# EAGLE board line-sensor (EAGLE 9.1.3)
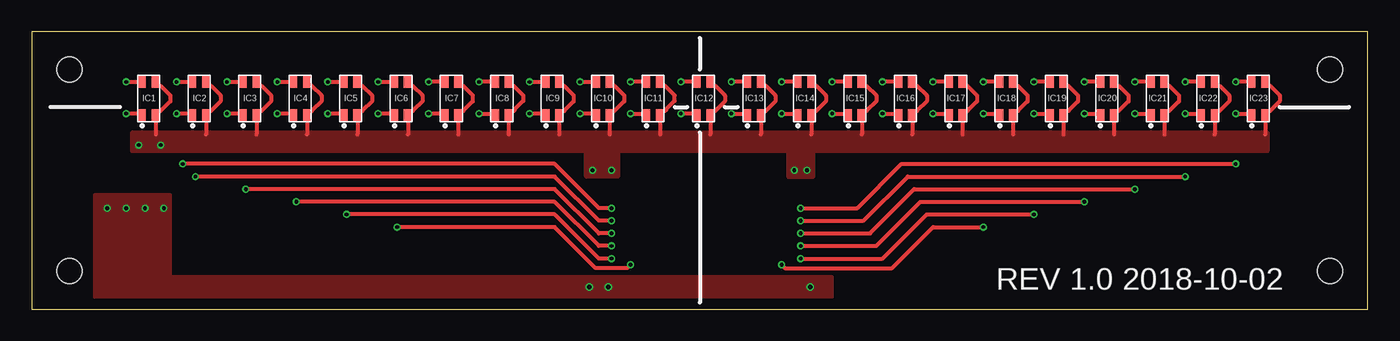
[diagram p0: board, top side]
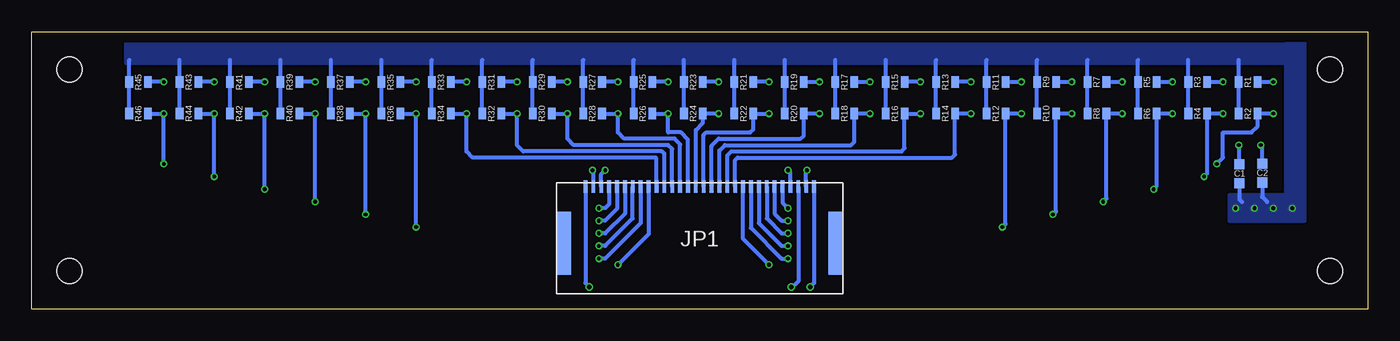
[diagram p1: board, bottom side, seen from below]

Size 106 x 22 mm. Coordinates in mm from the lower left corner, seen from the top.
Outline: 0,0 106,0 106,22 0,22 0,0
Copper layers (1*16): Top 0.035559375mm / dielectric 1.6mm / Bottom 0.035559375mm
Design rules "oshpark-2layer": minimum track width 6mil, minimum drill 10mil, track to track 6mil, track to pad 6mil, pad to pad 6mil, via to via 6mil, smd to smd 6mil, copper to edge 15mil, drill to drill 6mil, minimum pad ring 5mil, minimum via ring 5mil, stop-mask expansion 2.5mil, vias tented up to drill 0mil, thermal gap 10mil
Net classes: 1 ground: width 0.3 mm; 2 3v3: width 0.3 mm
Holes 2 mm at 3,19 3,3 103,19 103,3

## Footprints (pad centres in the part's own frame; a part is rotated, then mirrored left to right if it is on the bottom)
CAPACITOR-0603 = smd 0.8 x 0.8: 1 -0.75,0; 2 0.75,0
GP2S60 = smd 1 x 0.65: 1 -0.65,0.25; 2 -0.65,-0.85; 3 2.05,-0.85; 4 2.05,0.25
MOLEX-502046-3070 = smd 0.3 x 1: 1 9.062,-0.3; 2 8.438,-0.3; 3 7.812,-0.3; 4 7.188,-0.3; 5 6.562,-0.3; 6 5.938,-0.3; 7 5.312,-0.3; 8 4.688,-0.3; 9 4.062,-0.3; 10 3.438,-0.3; 11 2.812,-0.3; 12 2.188,-0.3; 13 1.562,-0.3; 14 0.938,-0.3; 15 0.312,-0.3; 16 -0.312,-0.3; 17 -0.938,-0.3; 18 -1.562,-0.3; 19 -2.188,-0.3; 20 -2.812,-0.3; 21 -3.438,-0.3; 22 -4.062,-0.3; 23 -4.688,-0.3; 24 -5.312,-0.3; 25 -5.938,-0.3; 26 -6.562,-0.3; 27 -7.188,-0.3; 28 -7.812,-0.3; 29 -8.438,-0.3; 30 -9.062,-0.3 | smd 1.15 x 5: NAIL1 10.775,-4.8; NAIL2 -10.775,-4.8
RESISTOR-0603 = smd 0.6 x 0.9: P$1 -0.75,0; P$2 0.75,0

## Placement (x,y rotation side)
C1  0.1u  [CAPACITOR-0603]  10.19,10.72 90 bottom
C2  10u  [CAPACITOR-0603]  8.39,10.78 90 bottom
IC1  GP2S60  [GP2S60]  9,16 90 top
IC2  GP2S60  [GP2S60]  13,16 90 top
IC3  GP2S60  [GP2S60]  17,16 90 top
IC4  GP2S60  [GP2S60]  21,16 90 top
IC5  GP2S60  [GP2S60]  25,16 90 top
IC6  GP2S60  [GP2S60]  29,16 90 top
IC7  GP2S60  [GP2S60]  33,16 90 top
IC8  GP2S60  [GP2S60]  37,16 90 top
IC9  GP2S60  [GP2S60]  41,16 90 top
IC10  GP2S60  [GP2S60]  45,16 90 top
IC11  GP2S60  [GP2S60]  49,16 90 top
IC12  GP2S60  [GP2S60]  53,16 90 top
IC13  GP2S60  [GP2S60]  57,16 90 top
IC14  GP2S60  [GP2S60]  61,16 90 top
IC15  GP2S60  [GP2S60]  65,16 90 top
IC16  GP2S60  [GP2S60]  69,16 90 top
IC17  GP2S60  [GP2S60]  73,16 90 top
IC18  GP2S60  [GP2S60]  77,16 90 top
IC19  GP2S60  [GP2S60]  81,16 90 top
IC20  GP2S60  [GP2S60]  85,16 90 top
IC21  GP2S60  [GP2S60]  89,16 90 top
IC22  GP2S60  [GP2S60]  93,16 90 top
IC23  GP2S60  [GP2S60]  97,16 90 top
JP1  MOLEX-502046-3070  [MOLEX-502046-3070]  53,10 0 bottom
R1  1k  [RESISTOR-0603]  9.5,18 180 bottom
R2  220k  [RESISTOR-0603]  9.5,15.5 180 bottom
R3  1k  [RESISTOR-0603]  13.5,18 180 bottom
R4  220k  [RESISTOR-0603]  13.5,15.5 180 bottom
R5  1k  [RESISTOR-0603]  17.5,18 180 bottom
R6  220k  [RESISTOR-0603]  17.5,15.5 180 bottom
R7  1k  [RESISTOR-0603]  21.5,18 180 bottom
R8  220k  [RESISTOR-0603]  21.5,15.5 180 bottom
R9  1k  [RESISTOR-0603]  25.5,18 180 bottom
R10  220k  [RESISTOR-0603]  25.5,15.5 180 bottom
R11  1k  [RESISTOR-0603]  29.5,18 180 bottom
R12  220k  [RESISTOR-0603]  29.5,15.5 180 bottom
R13  1k  [RESISTOR-0603]  33.5,18 180 bottom
R14  220k  [RESISTOR-0603]  33.5,15.5 180 bottom
R15  1k  [RESISTOR-0603]  37.5,18 180 bottom
R16  220k  [RESISTOR-0603]  37.5,15.5 180 bottom
R17  1k  [RESISTOR-0603]  41.5,18 180 bottom
R18  220k  [RESISTOR-0603]  41.5,15.5 180 bottom
R19  1k  [RESISTOR-0603]  45.5,18 180 bottom
R20  220k  [RESISTOR-0603]  45.5,15.5 180 bottom
R21  1k  [RESISTOR-0603]  49.5,18 180 bottom
R22  220k  [RESISTOR-0603]  49.5,15.5 180 bottom
R23  1k  [RESISTOR-0603]  53.5,18 180 bottom
R24  220k  [RESISTOR-0603]  53.5,15.5 180 bottom
R25  1k  [RESISTOR-0603]  57.5,18 180 bottom
R26  220k  [RESISTOR-0603]  57.5,15.5 180 bottom
R27  1k  [RESISTOR-0603]  61.5,18 180 bottom
R28  220k  [RESISTOR-0603]  61.5,15.5 180 bottom
R29  1k  [RESISTOR-0603]  65.5,18 180 bottom
R30  220k  [RESISTOR-0603]  65.5,15.5 180 bottom
R31  1k  [RESISTOR-0603]  69.5,18 180 bottom
R32  220k  [RESISTOR-0603]  69.5,15.5 180 bottom
R33  1k  [RESISTOR-0603]  73.5,18 180 bottom
R34  220k  [RESISTOR-0603]  73.5,15.5 180 bottom
R35  1k  [RESISTOR-0603]  77.5,18 180 bottom
R36  220k  [RESISTOR-0603]  77.5,15.5 180 bottom
R37  1k  [RESISTOR-0603]  81.5,18 180 bottom
R38  220k  [RESISTOR-0603]  81.5,15.5 180 bottom
R39  1k  [RESISTOR-0603]  85.5,18 180 bottom
R40  220k  [RESISTOR-0603]  85.5,15.5 180 bottom
R41  1k  [RESISTOR-0603]  89.5,18 180 bottom
R42  220k  [RESISTOR-0603]  89.5,15.5 180 bottom
R43  1k  [RESISTOR-0603]  93.5,18 180 bottom
R44  220k  [RESISTOR-0603]  93.5,15.5 180 bottom
R45  1k  [RESISTOR-0603]  97.5,18 180 bottom
R46  220k  [RESISTOR-0603]  97.5,15.5 180 bottom

## Library data of the parts
C1 C2 = capacitors
IC1-IC23 = sensors
JP1 = connectors
R1-R46 = resistors

## Nets
3V3 [3v3]: C1.1 C2.1 JP1.1 JP1.3 JP1.30 R1.P$2 R2.P$2 R3.P$2 R4.P$2 R5.P$2 R6.P$2 R7.P$2 R8.P$2 R9.P$2 R10.P$2 R11.P$2 R12.P$2 R13.P$2 R14.P$2 R15.P$2 R16.P$2 R17.P$2 R18.P$2 R19.P$2 R20.P$2 R21.P$2 R22.P$2 R23.P$2 R24.P$2 R25.P$2 R26.P$2 R27.P$2 R28.P$2 R29.P$2 R30.P$2 R31.P$2 R32.P$2 R33.P$2 R34.P$2 R35.P$2 R36.P$2 R37.P$2 R38.P$2 R39.P$2 R40.P$2 R41.P$2 R42.P$2 R43.P$2 R44.P$2 R45.P$2 R46.P$2
AGND [ground]: C1.2 C2.2 IC1.2 IC1.3 IC2.2 IC2.3 IC3.2 IC3.3 IC4.2 IC4.3 IC5.2 IC5.3 IC6.2 IC6.3 IC7.2 IC7.3 IC8.2 IC8.3 IC9.2 IC9.3 IC10.2 IC10.3 IC11.2 IC11.3 IC12.2 IC12.3 IC13.2 IC13.3 IC14.2 IC14.3 IC15.2 IC15.3 IC16.2 IC16.3 IC17.2 IC17.3 IC18.2 IC18.3 IC19.2 IC19.3 IC20.2 IC20.3 IC21.2 IC21.3 IC22.2 IC22.3 IC23.2 IC23.3 JP1.2 JP1.4 JP1.28 JP1.29
N$1: IC2.4 R3.P$1
N$2: IC1.4 R1.P$1
N$3: IC3.4 R5.P$1
N$4: IC4.4 R7.P$1
N$5: IC5.4 R9.P$1
N$6: IC6.4 R11.P$1
N$7: IC7.4 R13.P$1
N$8: IC8.4 R15.P$1
N$9: IC9.4 R17.P$1
N$10: IC10.4 R19.P$1
N$11: IC11.4 R21.P$1
N$12: IC12.4 R23.P$1
N$13: IC13.4 R25.P$1
N$14: IC14.4 R27.P$1
N$15: IC15.4 R29.P$1
N$16: IC16.4 R31.P$1
N$17: IC17.4 R33.P$1
N$18: IC18.4 R35.P$1
N$19: IC19.4 R37.P$1
N$20: IC20.4 R39.P$1
N$21: IC21.4 R41.P$1
N$22: IC22.4 R43.P$1
N$23: IC23.4 R45.P$1
SENSOR_1: IC1.1 JP1.5 R2.P$1
SENSOR_2: IC2.1 JP1.6 R4.P$1
SENSOR_3: IC3.1 JP1.7 R6.P$1
SENSOR_4: IC4.1 JP1.8 R8.P$1
SENSOR_5: IC5.1 JP1.9 R10.P$1
SENSOR_6: IC6.1 JP1.10 R12.P$1
SENSOR_7: IC7.1 JP1.11 R14.P$1
SENSOR_8: IC8.1 JP1.12 R16.P$1
SENSOR_9: IC9.1 JP1.13 R18.P$1
SENSOR_10: IC10.1 JP1.14 R20.P$1
SENSOR_11: IC11.1 JP1.15 R22.P$1
SENSOR_12: IC12.1 JP1.16 R24.P$1
SENSOR_13: IC13.1 JP1.17 R26.P$1
SENSOR_14: IC14.1 JP1.18 R28.P$1
SENSOR_15: IC15.1 JP1.19 R30.P$1
SENSOR_16: IC16.1 JP1.20 R32.P$1
SENSOR_17: IC17.1 JP1.21 R34.P$1
SENSOR_18: IC18.1 JP1.22 R36.P$1
SENSOR_19: IC19.1 JP1.23 R38.P$1
SENSOR_20: IC20.1 JP1.24 R40.P$1
SENSOR_21: IC21.1 JP1.25 R42.P$1
SENSOR_22: IC22.1 JP1.26 R44.P$1
SENSOR_23: IC23.1 JP1.27 R46.P$1

## Tracks (layer width: path | path; a pad name or v marks a point on that pad's centre or on a via)
3V3  (via drill 0.3, 0.35)
  Bottom 0.3: R20.P$2 R19.P$2 46.25,19.75 | R22.P$2 R21.P$2 50.25,19.75 | R24.P$2 R23.P$2 54.25,19.75 | R26.P$2 R25.P$2 58.25,19.75 | R30.P$2 R29.P$2 66.25,19.75 | R32.P$2 R31.P$2 70.25,19.75 | R34.P$2 R33.P$2 74.25,19.75 | R36.P$2 R35.P$2 78.25,19.75 | R38.P$2 R37.P$2 82.25,19.75 | R40.P$2 R39.P$2 86.25,19.75 | R42.P$2 R41.P$2 90.25,19.75 | R44.P$2 R43.P$2 94.25,19.75 | R46.P$2 R45.P$2 98.25,19.75 | R18.P$2 R17.P$2 42.25,19.75 | R16.P$2 R15.P$2 38.25,19.75 | R14.P$2 R13.P$2 34.25,19.75 | R12.P$2 R11.P$2 30.25,19.75 | R10.P$2 R9.P$2 26.25,19.75 | R8.P$2 R7.P$2 22.25,19.75 | R6.P$2 R5.P$2 18.25,19.75 | R4.P$2 R3.P$2 14.25,19.75 | R2.P$2 R1.P$2 10.25,19.75 | 62.25,19.75 R27.P$2 R28.P$2 | C2.1 8.39,8.89 8,8.5 | C1.1 10.19,8.69 10,8.5 | JP1.1 43.94,2.06 v44.25,1.75 | JP1.3 45.19,2.19 45.62,1.75 v45.75,1.75 | v61.75,1.75 62.06,2.06 JP1.30
  other vias: 6,8 7.5,8 9,8 10.5,8
  pour Bottom: 6,19.5 98.5,19.5 98.5,21 6,21
  pour Bottom: 6.5,21 6.5,9 11,9 11,7 5,7 5,21
  pour Top: 63.5,2.5 38,2.5 11,2.5 11,9 5,9 5,1 32,1 59.5,1 63.5,1
AGND  (via drill 0.3)
  Top 0.3: IC11.3 50.2,17.7 50.24,17.7 51,16.94 51,16.5 50.33,15.82 50.33,15.79 50.24,15.7 50.2,15.7 IC11.2 49.85,13.85 | IC12.3 54.2,17.7 54.24,17.7 55,16.94 55,16.46 54.24,15.7 54.2,15.7 IC12.2 53.85,13.85 | IC13.3 58.2,17.7 58.24,17.7 59,16.94 59,16.46 58.24,15.7 58.2,15.7 IC13.2 57.85,13.85 | IC14.3 62.2,17.7 62.24,17.7 63,16.94 63,16.46 62.24,15.7 62.2,15.7 IC14.2 61.85,13.85 | IC15.3 66.2,17.7 66.24,17.7 67,16.94 67,16.46 66.24,15.7 66.2,15.7 IC15.2 65.85,13.85 | IC16.3 70.2,17.7 70.24,17.7 71,16.94 71,16.46 70.24,15.7 70.2,15.7 IC16.2 69.85,13.85 | IC17.3 74.2,17.7 74.24,17.7 75,16.94 75,16.46 74.24,15.7 74.2,15.7 IC17.2 73.85,13.85 | IC18.3 78.2,17.7 78.24,17.7 79,16.94 79,16.46 78.24,15.7 78.2,15.7 IC18.2 77.85,13.85 | IC19.3 82.2,17.7 82.24,17.7 83,16.94 83,16.46 82.24,15.7 82.2,15.7 IC19.2 81.85,13.85 | IC20.3 86.2,17.7 86.24,17.7 87,16.94 87,16.46 86.24,15.7 86.2,15.7 IC20.2 85.85,13.85 | IC21.3 90.2,17.7 90.24,17.7 91,16.94 91,16.46 90.24,15.7 90.2,15.7 IC21.2 89.85,13.85 | IC22.3 94.2,17.7 94.24,17.7 95,16.94 95,16.46 94.24,15.7 94.2,15.7 IC22.2 93.85,13.85 | IC23.3 98.2,17.7 98.24,17.7 99,16.94 99,16.46 98.24,15.7 98.2,15.7 IC23.2 97.85,13.85 | IC10.3 46.2,17.7 46.24,17.7 47,16.94 47,16.46 46.24,15.7 46.2,15.7 IC10.2 45.85,13.85 | IC9.3 42.2,17.7 42.24,17.7 43,16.94 43,16.46 42.24,15.7 42.2,15.7 IC9.2 41.85,13.85 | IC8.3 38.2,17.7 38.24,17.7 39,16.94 39,16.5 38.33,15.82 38.33,15.79 38.24,15.7 38.2,15.7 IC8.2 37.85,13.85 | IC7.3 34.2,17.7 34.24,17.7 35,16.94 35,16.46 34.24,15.7 34.2,15.7 IC7.2 33.85,13.85 | IC6.3 30.2,17.7 30.24,17.7 31,16.94 31,16.46 30.24,15.7 30.2,15.7 IC6.2 29.85,13.85
  Top 0.3: IC5.3 26.2,17.7 26.24,17.7 27,16.94 27,16.46 26.24,15.7 26.2,15.7 IC5.2 25.85,13.85 | IC4.3 22.2,17.7 22.24,17.7 23,16.94 23,16.46 22.24,15.7 22.2,15.7 IC4.2 21.85,13.85 | IC3.3 18.2,17.7 18.24,17.7 19,16.94 19,16.46 18.24,15.7 18.2,15.7 IC3.2 17.85,13.85 | IC2.3 14.2,17.7 14.24,17.7 15,16.94 15,16.46 14.24,15.7 14.2,15.7 IC2.2 13.85,13.85 | IC1.3 10.2,17.7 10.24,17.7 11,16.94 11,16.46 10.24,15.7 10.2,15.7 IC1.2 9.85,13.85
  Bottom 0.3: JP1.28 60.81,10.69 v60.5,11 | JP1.29 61.44,10.94 v61.5,11 | JP1.2 44.56,10.94 v44.5,11 | JP1.4 45.81,10.81 v46,11 | C2.2 8.39,12.89 v8.5,13 | C1.2 10.19,12.94 v10.25,13
  pour Top: 8,14 98,14 98,12.5 8,12.5
  pour Top: 60,12.5 60,10.5 62,10.5 62,12.5
  pour Top: 44,10.5 44,12.5 46.5,12.5 46.5,10.5
N$1  (via drill 0.3)
  Top 0.3: v11.5,18 12.7,18 IC2.4
  Bottom 0.3: R3.P$1 v11.5,18
N$2  (via drill 0.3)
  Top 0.3: v7.5,18 8.7,18 IC1.4
  Bottom 0.3: R1.P$1 v7.5,18
N$3  (via drill 0.3)
  Top 0.3: v15.5,18 16.7,18 IC3.4
  Bottom 0.3: R5.P$1 v15.5,18
N$4  (via drill 0.3)
  Top 0.3: v19.5,18 20.7,18 IC4.4
  Bottom 0.3: R7.P$1 v19.5,18
N$5  (via drill 0.3)
  Top 0.3: v23.5,18 24.7,18 IC5.4
  Bottom 0.3: R9.P$1 v23.5,18
N$6  (via drill 0.3)
  Top 0.3: v27.5,18 28.7,18 IC6.4
  Bottom 0.3: R11.P$1 v27.5,18
N$7  (via drill 0.3)
  Top 0.3: IC7.4 32.7,18 v31.5,18
  Bottom 0.3: v31.5,18 R13.P$1
N$8  (via drill 0.3)
  Top 0.3: IC8.4 36.7,18 v35.5,18
  Bottom 0.3: v35.5,18 R15.P$1
N$9  (via drill 0.3)
  Top 0.3: v39.5,18 40.7,18 IC9.4
  Bottom 0.3: R17.P$1 v39.5,18
N$10  (via drill 0.3)
  Top 0.3: v43.5,18 44.7,18 IC10.4
  Bottom 0.3: R19.P$1 v43.5,18
N$11  (via drill 0.3)
  Top 0.3: IC11.4 48.7,18 v47.5,18
  Bottom 0.3: v47.5,18 R21.P$1
N$12  (via drill 0.3)
  Top 0.3: IC12.4 52.7,18 v51.5,18
  Bottom 0.3: v51.5,18 R23.P$1
N$13  (via drill 0.3)
  Top 0.3: IC13.4 56.7,18 v55.5,18
  Bottom 0.3: v55.5,18 R25.P$1
N$14  (via drill 0.3)
  Top 0.3: IC14.4 60.7,18 v59.5,18
  Bottom 0.3: v59.5,18 R27.P$1
N$15  (via drill 0.3)
  Top 0.3: IC15.4 64.7,18 v63.5,18
  Bottom 0.3: v63.5,18 R29.P$1
N$16  (via drill 0.3)
  Top 0.3: IC16.4 68.7,18 v67.5,18
  Bottom 0.3: v67.5,18 R31.P$1
N$17  (via drill 0.3)
  Top 0.3: IC17.4 72.7,18 v71.5,18
  Bottom 0.3: v71.5,18 R33.P$1
N$18  (via drill 0.3)
  Top 0.3: IC18.4 76.7,18 v75.5,18
  Bottom 0.3: v75.5,18 R35.P$1
N$19  (via drill 0.3)
  Top 0.3: IC19.4 80.7,18 v79.5,18
  Bottom 0.3: v79.5,18 R37.P$1
N$20  (via drill 0.3)
  Top 0.3: IC20.4 84.7,18 v83.5,18
  Bottom 0.3: v83.5,18 R39.P$1
N$21  (via drill 0.3)
  Top 0.3: IC21.4 88.7,18 v87.5,18
  Bottom 0.3: v87.5,18 R41.P$1
N$22  (via drill 0.3)
  Top 0.3: IC22.4 92.7,18 v91.5,18
  Bottom 0.3: v91.5,18 R43.P$1
N$23  (via drill 0.3)
  Top 0.3: IC23.4 96.7,18 v95.5,18
  Bottom 0.3: v95.5,18 R45.P$1
SENSOR_1  (via drill 0.3)
  Top 0.3: IC1.1 8.6,15.5 v7.5,15.5 | v46,8 45,8 41.5,11.5 v12,11.5 | v12,11.5
  Bottom 0.3: v7.5,15.5 R2.P$1 8.75,14.5 9.25,14 11.5,14 11.5,12 v12,11.5 | JP1.5 46.44,8.44 v46,8
SENSOR_2  (via drill 0.3)
  Top 0.3: IC2.1 12.6,15.5 v11.5,15.5 | v46,7 45.5,7 45,7 41.5,10.5 v13,10.5
  Bottom 0.3: v11.5,15.5 R4.P$1 12.75,10.75 v13,10.5 | JP1.6 47.06,7.56 46.5,7 v46,7
SENSOR_3  (via drill 0.3)
  Top 0.3: IC3.1 16.6,15.5 v15.5,15.5 | v46,6 45,6 41.5,9.5 v17,9.5
  Bottom 0.3: v15.5,15.5 R6.P$1 16.75,9.75 v17,9.5 | JP1.7 47.69,7.19 46.5,6 v46,6
SENSOR_4  (via drill 0.3)
  Top 0.3: IC4.1 20.6,15.5 v19.5,15.5 | v46,5 45,5 41.5,8.5 v21,8.5
  Bottom 0.3: v19.5,15.5 R8.P$1 20.75,8.75 v21,8.5 | JP1.8 48.31,6.81 46.5,5 v46,5
SENSOR_5  (via drill 0.3)
  Top 0.3: IC5.1 24.6,15.5 v23.5,15.5 | v46,4 45,4 41.5,7.5 v25,7.5
  Bottom 0.3: v23.5,15.5 R10.P$1 24.75,7.75 v25,7.5 | JP1.9 48.94,6.44 46.5,4 v46,4
SENSOR_6  (via drill 0.3)
  Top 0.3: IC6.1 28.6,15.5 v27.5,15.5 | v29,6.5 41.5,6.5 44.75,3.25 47.25,3.25 v47.5,3.5
  Bottom 0.3: v27.5,15.5 R12.P$1 28.75,6.75 v29,6.5 | JP1.10 49.56,5.56 v47.5,3.5
SENSOR_7  (via drill 0.3)
  Top 0.3: IC7.1 32.6,15.5 v31.5,15.5
  Bottom 0.3: v31.5,15.5 R14.P$1 32.75,12.25 33,12 50,12 50.19,11.81 JP1.11
SENSOR_8  (via drill 0.3)
  Top 0.3: v35.5,15.5 36.6,15.5 IC8.1
  Bottom 0.3: v35.5,15.5 R16.P$1 36.75,12.75 37,12.5 50.5,12.5 50.81,12.19 JP1.12
SENSOR_9  (via drill 0.3)
  Top 0.3: IC9.1 40.6,15.5 v39.5,15.5
  Bottom 0.3: v39.5,15.5 R18.P$1 40.75,13.25 41,13 51,13 51.44,12.56 JP1.13
SENSOR_10  (via drill 0.3)
  Top 0.3: IC10.1 44.6,15.5 v43.5,15.5
  Bottom 0.3: v43.5,15.5 R20.P$1 44.75,13.75 45,13.5 51.5,13.5 52.06,12.94 JP1.14
SENSOR_11  (via drill 0.3)
  Top 0.3: v47.5,15.5 48.6,15.5 IC11.1
  Bottom 0.3: v47.5,15.5 R22.P$1 48.75,14.25 49,14 52.5,14 52.69,13.81 JP1.15
SENSOR_12  (via drill 0.3)
  Top 0.3: IC12.1 52.6,15.5 v51.5,15.5
  Bottom 0.3: v51.5,15.5 R24.P$1 52.75,14.75 53.31,14.19 JP1.16
SENSOR_13  (via drill 0.3)
  Top 0.3: v55.5,15.5 56.6,15.5 IC13.1
  Bottom 0.3: R26.P$1 v55.5,15.5 55.5,14 54.5,14 53.94,13.44 JP1.17
SENSOR_14  (via drill 0.3)
  Top 0.3: v59.5,15.5 60.6,15.5 IC14.1
  Bottom 0.3: R28.P$1 v59.5,15.5 59.5,14 59,13.5 55,13.5 54.56,13.06 JP1.18
SENSOR_15  (via drill 0.3)
  Top 0.3: v63.5,15.5 64.6,15.5 IC15.1
  Bottom 0.3: R30.P$1 v63.5,15.5 63.5,13.5 63,13 55.5,13 55.19,12.69 JP1.19
SENSOR_16  (via drill 0.3)
  Top 0.3: v67.5,15.5 68.6,15.5 IC16.1
  Bottom 0.3: R32.P$1 v67.5,15.5 67.5,13 67,12.5 56,12.5 55.81,12.31 JP1.20
SENSOR_17  (via drill 0.3)
  Top 0.3: v71.5,15.5 72.6,15.5 IC17.1
  Bottom 0.3: R34.P$1 v71.5,15.5 71.5,12.5 71,12 56.5,12 56.44,11.94 JP1.21
SENSOR_18  (via drill 0.3)
  Top 0.3: v75.5,15.5 76.6,15.5 IC18.1 | v75.5,6.5 71.5,6.5 68.25,3.25 59.75,3.25 v59.5,3.5
  Bottom 0.3: R36.P$1 v75.5,15.5 v75.5,6.5 | JP1.22 57.06,5.94 v59.5,3.5
SENSOR_19  (via drill 0.3)
  Top 0.3: v79.5,15.5 80.6,15.5 IC19.1 | v61,4 67.5,4 71,7.5 v79.5,7.5
  Bottom 0.3: R38.P$1 v79.5,15.5 v79.5,7.5 | JP1.23 57.69,6.81 60.5,4 v61,4
SENSOR_20  (via drill 0.3)
  Top 0.3: v83.5,15.5 84.6,15.5 IC20.1 | v83.5,8.5 70.5,8.5 67,5 v61,5
  Bottom 0.3: R40.P$1 v83.5,15.5 v83.5,8.5 | JP1.24 58.31,7.19 60.5,5 v61,5
SENSOR_21  (via drill 0.3)
  Top 0.3: v87.5,15.5 88.6,15.5 IC21.1 | v61,6 66.5,6 70,9.5 v87.5,9.5
  Bottom 0.3: R42.P$1 v87.5,15.5 v87.5,9.5 | JP1.25 58.94,7.56 60.5,6 v61,6
SENSOR_22  (via drill 0.3)
  Top 0.3: v91.5,15.5 92.6,15.5 IC22.1 | v91.5,10.5 69.5,10.5 66,7 v61,7
  Bottom 0.3: R44.P$1 v91.5,15.5 v91.5,10.5 | JP1.26 59.56,7.94 60.5,7 v61,7
SENSOR_23  (via drill 0.3)
  Top 0.3: v95.5,15.5 96.6,15.5 IC23.1 | v61,8 65.5,8 69,11.5 v95.5,11.5
  Bottom 0.3: R46.P$1 v95.5,15.5 v95.5,11.5 | JP1.27 60.19,8.31 60.5,8 v61,8

## Text on the board
tNames: REV 1.0 2018-10-02